# Allegro board sid_module_b2.brd
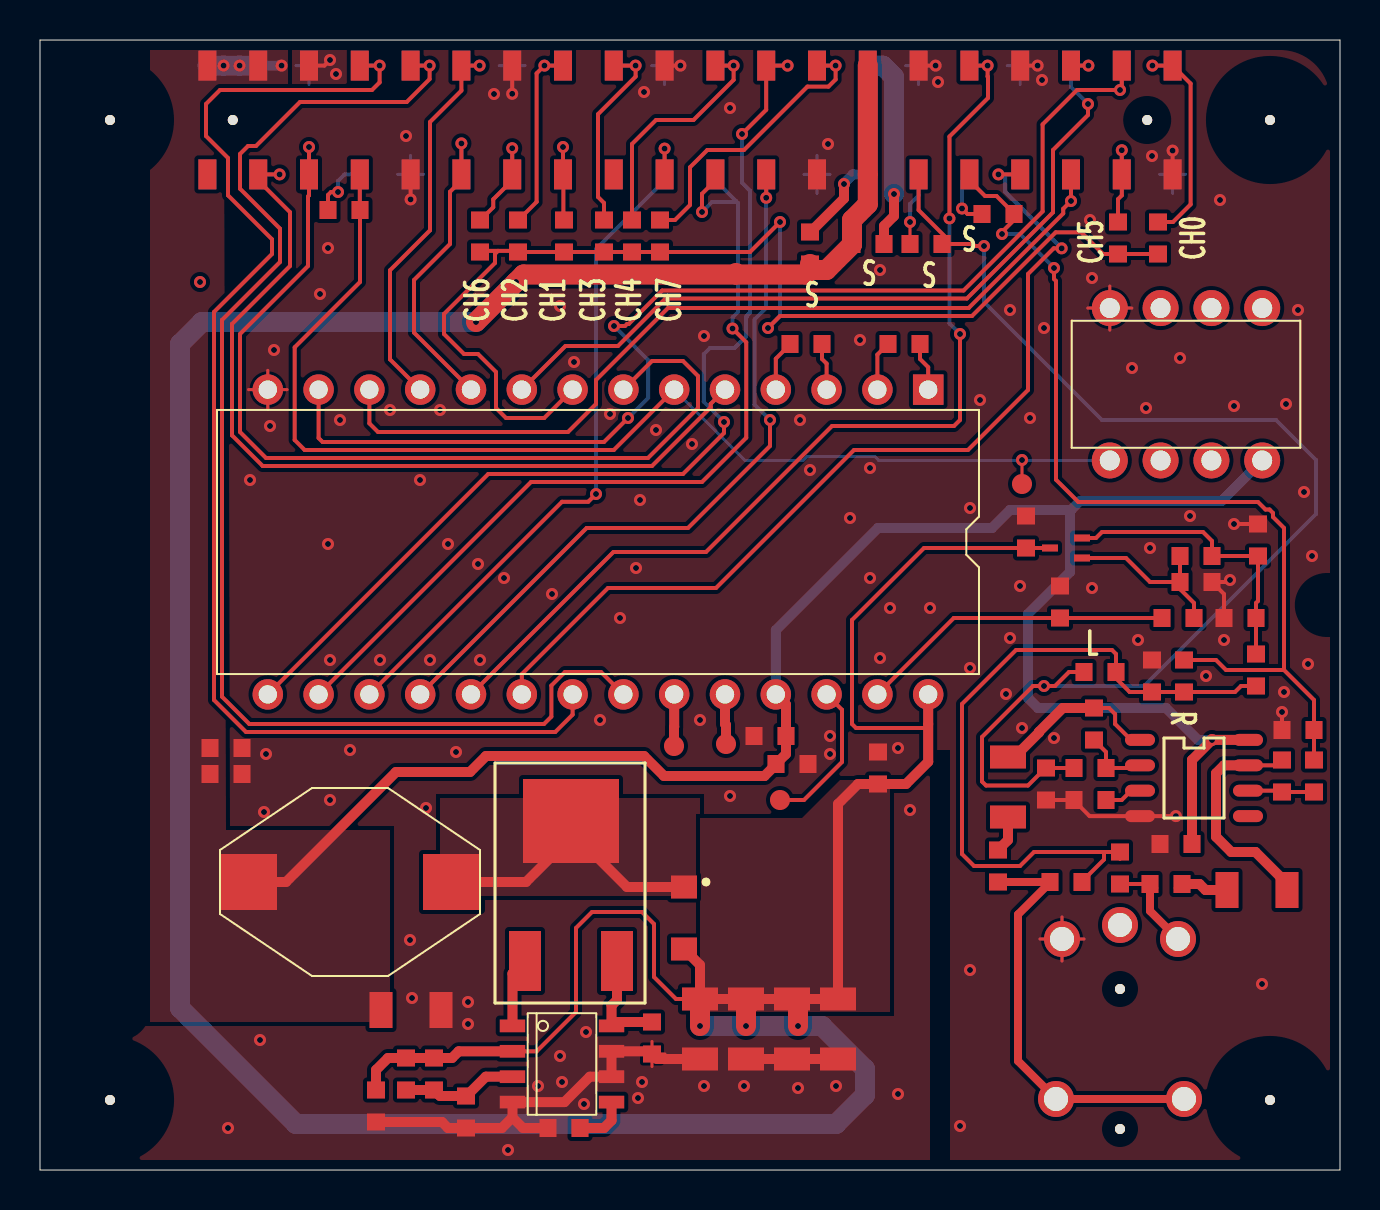
[diagram p0: board, top side]
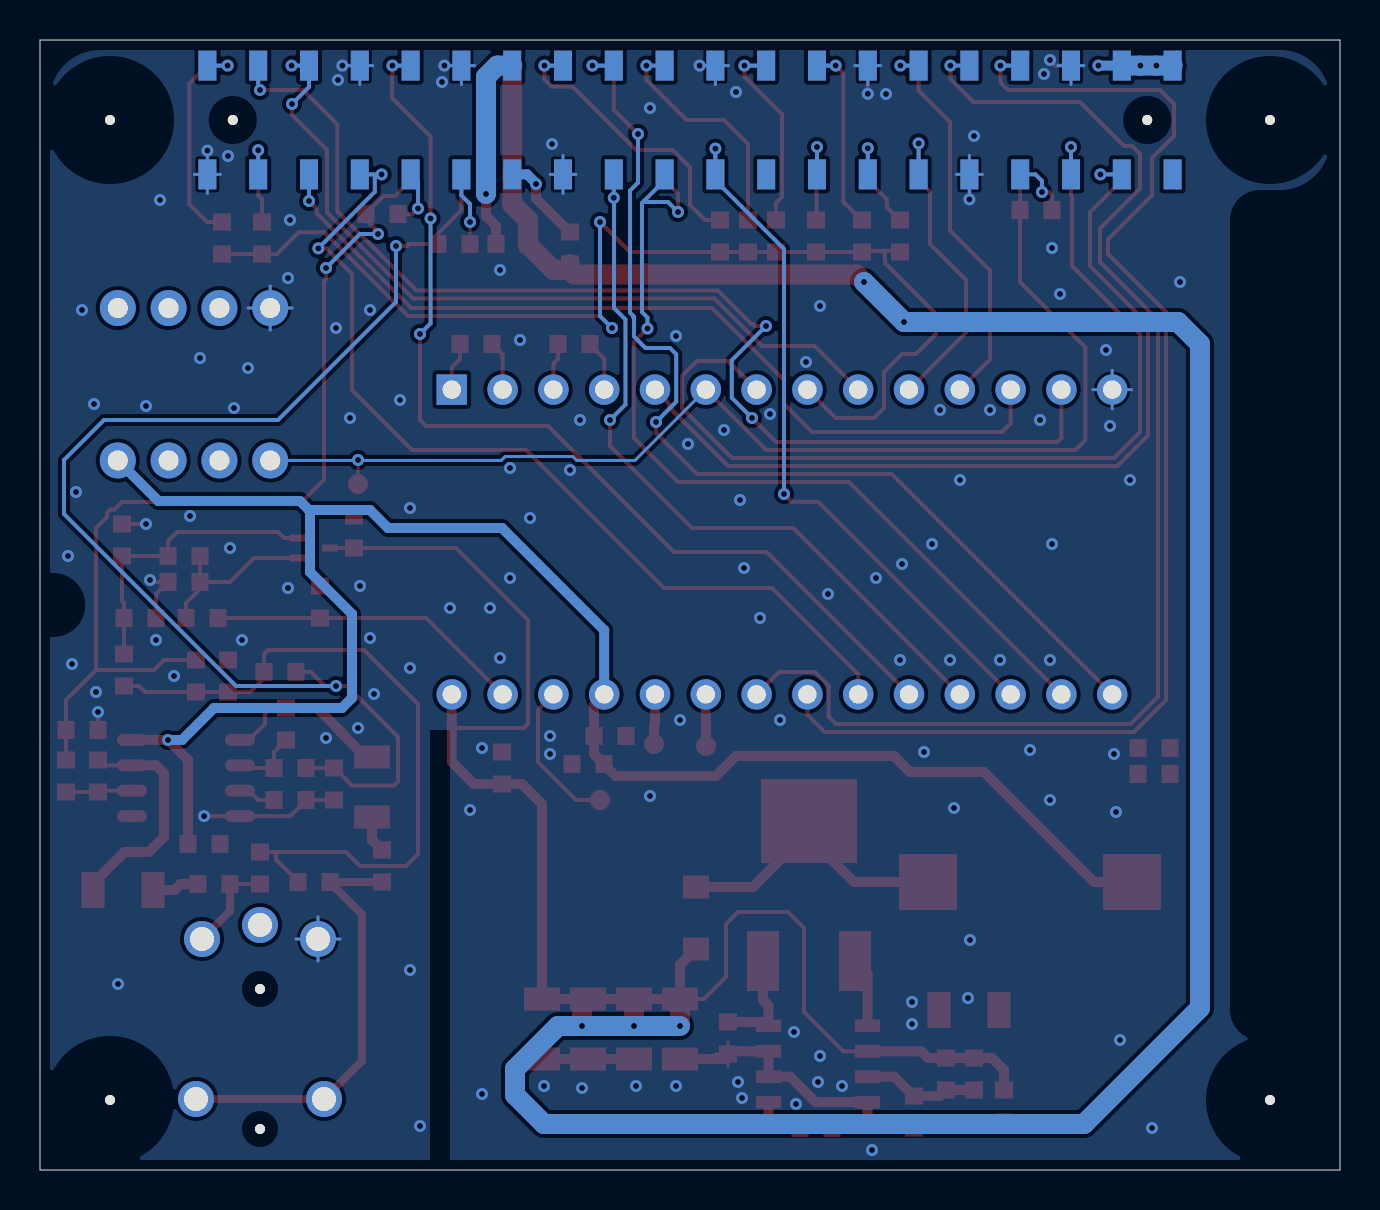
[diagram p1: board, bottom side, seen from below]

Outline 65 x 56.5 mm; copper layers: TOP, BOTTOM. Coordinates in mm from the lower left corner of the outline.
Outline path: 0,56.5 65,56.5 65,0 0,0 0,56.5

## Design rules (mm)
constraint set DEFAULT: min track width 0.15
net group RPI_INTERFACE: nets ID_SC ID_SD

## Placement (name value [footprint] x y rotation side)
C65  100n  [CAPC1608]  9.3 19.8 0 top
C67  100n  [CAPC1608]  9.3 21.1 0 top
C68  470p  [CAPC1608]  43.2 41.3 180 top
C69  470p  [CAPC1608]  38.3 41.3 180 top
C70  1n  [CAPC1608]  57.8 29.4 0 top
C71  470p  [CAPC1608]  57.8 30.7 0 top
C72  220p  [CAPC1608]  60.9 31.5 90 top
C73  10uF  [CAPC1608]  60.8 25 270 top
C74  100n  [CAPC1608]  36.5 21.7 0 top
C75  10uF  [CAPC1608]  49.3 31.9 270 top
C76  100n  [CAPC1608]  41.9 20.1 270 top
C77  10uF  [CAPC1608]  37.6 20.3 180 top
C78  100n  [CAPC1608]  56.8 16.3 0 top
C79  470uF  [CAPC3216X180N]  48.4 19.15 270 top
C80  470uF  [CAPC3216X180N]  60.85 14 180 top
C81  1n  [CAPC1608]  62.9 22 180 top
C82  1n  [CAPC1608]  50.3 19.3 270 top
C83  10uF  [CAPC1608]  52.5 18.5 0 top
C84  100n  [CAPC1608]  16.8 3.2 270 top
C85  47u  [CAPC3216X180N]  18.55 8 0 top
C86  47u  [CAPC3216X180N]  33 7.05 270 top
C87  47u  [CAPC3216X180N]  37.6 7.05 270 top
C88  47u  [CAPC3216X180N]  35.3 7.05 270 top
C89  47u  [CAPC3216X180N]  39.9 7.05 270 top
C90  100n  [CAPC1608]  26.2 2.1 180 top
C91  100pF  [CAPC1608]  18.3 4.8 90 top
D1  MBR120VLSFT3G  [SOD123FL]  32.2 12.6 270 top
J7  STX-35017-4N  [KYCON_STX-35017-4N]  54 3.55 0 top
J8  -  [95157-440LF]  32.5 52.5 0 top
J9  HLE-120-02-F-DV-BE-A  [95157-440LF_MH]  32.5 52.5 0 bottom
L3  22uH  [DO3316P]  15.5 14.4 0 top
NOREF  -  [unnamed]  3.5 52.5 0 top
NOREF#2  -  [#2]  0 53 0 top
NOREF#3  -  [#2]  6.2 71.6 0 top
NOREF#4  -  [#2]  105.34 -10.86 0 top
NOREF#5  -  [unnamed]  61.5 3.5 0 top
NOREF#6  -  [unnamed]  3.5 3.5 0 top
NOREF#7  -  [unnamed]  61.5 52.5 0 top
NOREF#8  -  [#2]  75 53 0 top
NOREF#9  -  [#2]  62 0 90 top
NOREF#10  -  [#2]  5.9 111 0 top
PP1  PP_SMT_ROUND_1P1MM  [TP_SMT_R1MM]  37 18.5 0 top
PP2  PP_SMT_ROUND_1P1MM  [TP_SMT_R1MM]  34.3 21.3 0 top
PP3  PP_SMT_ROUND_1P1MM  [TP_SMT_R1MM]  31.7 21.2 0 top
PP4  PP_SMT_ROUND_1P1MM  [TP_SMT_R1MM]  49.1 34.3 0 top
Q1  BC547B  [SOT50P160X90-3N]  51.3 31.1 180 top
Q2  MTD20N03HDL  [DPAK3]  36.05 11.75 270 top
R162  10K  [RESC1608]  56.9 27.6 180 top
R163  NF  [RESC1608]  55.6 24.7 270 top
R178  0R  [RESC1608]  15.2 48 0 top
R186  0R  [RESC1608]  26.2 46.7 90 top
R187  0R  [RESC1608]  23.9 46.7 90 top
R188  0R  [RESC1608]  28.2 46.7 90 top
R190  0R  [RESC1608]  55.9 46.6 90 top
R191  0R  [RESC1608]  29.6 46.7 90 top
R192  0R  [RESC1608]  53.9 46.6 90 top
R193  0R  [RESC1608]  22 46.7 90 top
R194  0R  [RESC1608]  31 46.7 90 top
R195  0R  [RESC1608]  41.4 46.3 0 top
R196  0R  [RESC1608]  38.5 46.1 270 top
R197  0R  [RESC1608]  44.3 46.3 0 top
R198  0R  [RESC1608]  47.9 47.8 0 top
R199  1K  [RESC1608]  60 27.6 0 top
R200  1K  [RESC1608]  51 28.4 270 top
R201  600R  [RESC1608]  53 24.9 0 top
R202  600R  [RESC1608]  57.2 24.7 270 top
R203  22K  [RESC1608]  52.7 22.3 270 top
R204  22K  [RESC1608]  62.1 19.7 270 top
R205  10K  [RESC1608]  63.7 19.7 90 top
R206  10K  [RESC1608]  52.5 20.1 180 top
R207  0R  [RESC1608]  47.9 15.2 90 top
R208  0R  [RESC1608]  56.3 14.3 0 top
R209  NF  [RESC1608]  51.3 14.4 0 top
R210  NF  [RESC1608]  54 15.1 90 top
R213  140K  [RESC1608]  19.7 4.8 270 top
R214  40mR  [RESC1608]  30.6 6.6 90 top
R215  28K  [RESC1608]  21.3 2.9 90 top
U1  MOS6581  [DIP28]  44.41 39.02 270 top
U2  TPA6111A2  [SOIC-8]  57.7 19.6 0 top
U3  MAX1771CSA  [SOIC8]  26.1 5.3 0 top
U4  -  [DIP8]  57.3 39.29 270 top

## Library data of the parts
C65 C67-C84 C90 C91 = CAP_1005_6.3V_100n
C85-C89 = CAP_2012_6.3V_10u
D1 = DIO_4
J7 = CON_AUD_STX-35017-4N
J8 = CON_40W_PINHDR
J9 = CON_2X20W_HLE_SMT
L3 = INDUCTOR
PP1-PP4 = PP_SMT_ROUND_1P1MM
Q1 = NPN_MMBT3904T
Q2 = MTD20N03HDL
R162 R163 R178 R186-R188 R190-R210 R213-R215 = RES_1005_33R
U1 = MOS6581: Tolerance: ***; User Part Number: ***
U2 = TPA6111A2
U3 = MAX1771CSA: Tolerance: ***; User Part Number: ***
U4 = DIP8

## Footprints (pads in the part's own frame, mm; a bottom-side part is the same pattern mirrored in y, then rotated)
95157-440LF
  rect 0.9x1.5 smd: 1(-24.13,-2.72) 2(-24.13,2.72) 3(-21.59,-2.72) 4(-21.59,2.72) 5(-19.05,-2.72) 6(-19.05,2.72) 7(-16.51,-2.72) 8(-16.51,2.72) 9(-13.97,-2.72) 10(-13.97,2.72) 11(-11.43,-2.72) 12(-11.43,2.72) 13(-8.89,-2.72) 14(-8.89,2.72) 15(-6.35,-2.72) 16(-6.35,2.72) 17(-3.81,-2.72) 18(-3.81,2.72) 19(-1.27,-2.72) 20(-1.27,2.72) 21(1.27,-2.72) 22(1.27,2.72) 23(3.81,-2.72) 24(3.81,2.72) 25(6.35,-2.72) 26(6.35,2.72) 27(8.89,-2.72) 28(8.89,2.72) 29(11.43,-2.72) 30(11.43,2.72) 31(13.97,-2.72) 32(13.97,2.72) 33(16.51,-2.72) 34(16.51,2.72) 35(19.05,-2.72) 36(19.05,2.72) 37(21.59,-2.72) 38(21.59,2.72) 39(24.13,-2.72) 40(24.13,2.72)
95157-440LF_MH
  round 0.5 hole 1.8 unplated: (-22.86,0) (22.86,0)
  rect 0.9x1.5 smd: 1(-24.13,-2.72) 2(-24.13,2.72) 3(-21.59,-2.72) 4(-21.59,2.72) 5(-19.05,-2.72) 6(-19.05,2.72) 7(-16.51,-2.72) 8(-16.51,2.72) 9(-13.97,-2.72) 10(-13.97,2.72) 11(-11.43,-2.72) 12(-11.43,2.72) 13(-8.89,-2.72) 14(-8.89,2.72) 15(-6.35,-2.72) 16(-6.35,2.72) 17(-3.81,-2.72) 18(-3.81,2.72) 19(-1.27,-2.72) 20(-1.27,2.72) 21(1.27,-2.72) 22(1.27,2.72) 23(3.81,-2.72) 24(3.81,2.72) 25(6.35,-2.72) 26(6.35,2.72) 27(8.89,-2.72) 28(8.89,2.72) 29(11.43,-2.72) 30(11.43,2.72) 31(13.97,-2.72) 32(13.97,2.72) 33(16.51,-2.72) 34(16.51,2.72) 35(19.05,-2.72) 36(19.05,2.72) 37(21.59,-2.72) 38(21.59,2.72) 39(24.13,-2.72) 40(24.13,2.72)
CAPC1608
  rect 0.85x0.9 smd: 1(-0.8,0) 2(0.8,0)
CAPC3216X180N
  rect 1.15x1.8 smd: 1(-1.5,0) 2(1.5,0)
DIP8
  round 1.8 hole 1: 1(-3.81,3.81) 2(-3.81,1.27) 3(-3.81,-1.27) 4(-3.81,-3.81) 5(3.81,-3.81) 6(3.81,-1.27) 7(3.81,1.27) 8(3.81,3.81)
DIP28
  rect 1.524x1.524 hole 0.914: 1(0,0)
  round 1.524 hole 0.914: 2(0,-2.54) 3(0,-5.08) 4(0,-7.62) 5(0,-10.16) 6(0,-12.7) 7(0,-15.24) 8(0,-17.78) 9(0,-20.32) 10(0,-22.86) 11(0,-25.4) 12(0,-27.94) 13(0,-30.48) 14(0,-33.02) 15(15.24,-33.02) 16(15.24,-30.48) 17(15.24,-27.94) 18(15.24,-25.4) 19(15.24,-22.86) 20(15.24,-20.32) 21(15.24,-17.78) 22(15.24,-15.24) 23(15.24,-12.7) 24(15.24,-10.16) 25(15.24,-7.62) 26(15.24,-5.08) 27(15.24,-2.54) 28(15.24,0)
DO3316P
  rect 2.9x2.8 smd: 1(-5.1,0) 2(5.1,0)
DPAK3
  rect 3x1.6 smd: 1(1.3,-11.8) 3(1.3,-7.2)
  rect 4.2x4.8 smd: 2(-5.7,-9.5)
KYCON_STX-35017-4N
  round 0.5 hole 1.2 unplated: (0,5.5) (0,-1.5)
  round 1.8 hole 1.2: 1(0,8.7) 2(-2.9,8) 3(2.9,8) 4(-3.2,0) 5(3.2,0)
RESC1608
  rect 0.85x0.9 smd: 1(-0.8,0) 2(0.8,0)
SOD123FL
  rect 1.15x1.3 smd: 1(-1.55,0) 2(1.55,0)
SOIC8
  rect 1.27x0.635 smd: 1(-2.477,1.905) 2(-2.477,0.635) 3(-2.477,-0.635) 4(-2.477,-1.905) 5(2.477,-1.905) 6(2.477,-0.635) 7(2.477,0.635) 8(2.477,1.905)
SOIC-8
  oval 1.5x0.6 smd: 1(-2.7,1.905) 2(-2.7,0.635) 3(-2.7,-0.635) 4(-2.7,-1.905) 5(2.7,-1.905) 6(2.7,-0.635) 7(2.7,0.635) 8(2.7,1.905)
SOT50P160X90-3N
  rect 0.8x0.35 smd: 1(-0.8,0.5) 2(-0.8,-0.5) 3(0.8,0)
TP_SMT_R1MM
  round 1 smd: 1(0,0)
unnamed
  round 0.5 hole 2.75 unplated: (0,0)

## Nets
5V: C65.1 C67.1 C74.2 C77.2 C78.2 C85.1 J8.2 J8.4 J9.1 J9.3 L3.1 U1.25 U2.8 U4.8
12V: C75.2 C76.2 C84.1 C86.1 C87.1 C88.1 C89.1 C91.2 D1.2 J8.27 J8.28 Q1.3 R195.1 R196.2 R213.1 U1.28(VDD) U3.2(VP)
GND: C65.2 C67.2 C70.2 C72.2 C74.1 C75.1 C76.1 C77.1 C78.1 C81.2 C82.2 C83.1 C84.2 C85.2 C86.2 C87.2 C88.2 C89.2 C90.2 J7.2 J8.6 J8.9(P9) J8.14 J8.20 J8.25 J8.30 J8.34 J8.39 J9.5 J9.10 J9.13 J9.19 J9.26 J9.29 J9.33 J9.40 R163.1 R199.1 R200.1 R214.1 R215.1 U1.14 U2.4 U3.4 U3.6 U3.7 U4.4
AUD_L: C82.1 J8.29 R197.2 R201.1 R206.2
AUD_OUT: R162.2 R200.2 U1.27
AUD_R: C81.1 J8.31 R198.2 R202.1 R205.2
GPIO2: J8.3 J9.4 U1.5
GPIO3: J8.5 J9.6 U1.7
GPIO5: J9.30 R197.1
GPIO6: J9.32 R198.1
GPIO7: J8.26 J9.25 R194.2
GPIO21: J8.40 J9.39 R190.2
GPIO22: J8.15 J9.16 R186.2
GPIO23: J8.16 J9.15 R187.2
GPIO24: J8.18 J9.17 R188.2
GPIO25: J8.22 J9.21 R191.2
GPIO26: J8.37 J9.38 R192.2
GPIO27: J8.13 J9.14 R193.2
ID_SC: J9.27 R195.2
ID_SD: J9.28 R196.1
SID_A0: J8.36 J9.35 U1.9
SID_A1: J8.11 J9.12 U1.10
SID_A2: J8.12 J9.11 U1.11
SID_A3: J8.35 J9.36 U1.12
SID_A4: J8.38 J9.37 U1.13
SID_CLK: J8.7 PP4.1 R178.2 U1.6 U4.5
SID_CS_N: R186.1 R187.1 R188.1 R190.1 R191.1 R192.1 R193.1 R194.1 U1.8
SID_D0: J8.24 J9.23 U1.15
SID_D1: J8.21 J9.22 U1.16
SID_D2: J8.19 J9.20 U1.17
SID_D3: J8.23 J9.24 U1.18
SID_D4: J8.32 J9.31 U1.19
SID_D5: J8.33 J9.34 U1.20
SID_D6: J8.8 J9.7 U1.21
SID_D7: J8.10 J9.9(P9) U1.22
N1069657: J7.4 J7.5(P5) R207.1 R209.1
N1069661: J7.3 R208.1 R210.1
N1070456: C69.2 U1.4
N1070463: C69.1 U1.3
N1070481: C68.2 U1.2
N1070488: C68.1 U1.1
N1071117: J9.8 R178.1
N1076729: C70.1 C71.1 Q1.1 R162.1
N1076755: C71.2 C72.1 C73.1 Q1.2(E) R199.2
N1077033: C73.2 R163.2 R201.2 R202.2 R209.2 R210.2
N1078035: C80.1 R204.1 U2.7(VO2)
N1078060: C79.1 R203.1 U2.1
N1078092: R203.2 R206.1 U2.2
N1078096: R204.2 R205.1 U2.6
N1078793: PP1.1 U1.26
N1078822: PP2.1 U1.24
N1078826: PP3.1 U1.23
N1081823: C80.2 R208.2
N1081858: C79.2 R207.2
N1082664: C83.2 U2.3
N2249255: D1.1 L3.2 Q2.2
N2249259: Q2.1 U3.1
N2249263: Q2.3(S) R214.2 U3.8
N2249272: C91.1 R213.2 R215.2 U3.3
N2250846: C90.1 U3.5

Pads without a net: J7 1; J8 1 17; J9 2 18; U2 5; U4 1 2 3 6 7

## Via types
v1: diameter 0.6, hole 0.3, TOP to BOTTOM, 178 vias

## Routing (per net, layer and track width the routed paths; a pad name or vN(x,y) marks a point on that pad's centre or on a via; arc(x,y) is an arc through that point)
5V: length 96.1
  TOP w0.5: C78.2 57.6,20.5 58.6,21.5 ; 58.6,21.5 60.4,21.5 ; 58.6,21.5 v1(58.6,21.5) ; U1.25 37.3,23.27 C74.2 37.3,20.8 C77.2 36.8,20.27 36.23,19.7 31.2,19.7 30.2,20.7 22.3,20.7 21.5,19.9 17.8,19.9 12.3,14.4 L3.1
  BOTTOM w0.5: 51.55,33 51.5,32.95 51.5,29.9 49.4,27.8 49.4,23.6 49.9,23.1 56.3,23.1 57.9,21.5 v1(58.6,21.5) ; 51.55,33 52,33.45 59.08,33.45 U4.8 ; 51.55,33 48.5,33 47.6,32.1 41.9,32.1 36.79,26.99 U1.25 ; v1(12.08,55.22) J8.4
  BOTTOM w1: J8.2 v1(9.18,55.22) v1(9.98,55.22) J8.4
12V: length 208.5
  TOP w0.2: 44.41,22.3 44.21,22.1 40.8,22.1 40.6,22.3 40.6,27.5 44.2,31.1 C75.2 Q1.3 ; U3.2 24.84,5.93 26.8,7.9 26.8,12.1 27.6,12.9 30.1,12.9 30.7,12.3 30.7,9.65 31.8,8.55 C86.1
  TOP w0.5: C84.1 16.8,5 17.4,5.6 C91.2 R213.1 20.6,5.6 20.93,5.93 U3.2 ; D1.2 33,10.25 C86.1 C88.1 C87.1 C89.1 39.9,18.3 40.9,19.3 C76.2 43.3,19.3 44.41,20.41 U1.28
  TOP w1: C87.1 37.9,8.25 v1(37.9,7.2) ; C88.1 35.5,8.35 35.3,8.15 v1(35.3,7.2) ; R196.2 38.5,45 ; 38.5,45 38.27,44.77 34.8,44.77 ; 38.5,45 39.33,45 40.6,46.27 R195.1 40.6,47.5 41.39,48.29 J8.27 J8.28 ; 34.8,44.77 24.18,44.77 v1(23.8,44.4) v1(21.8,42.4) ; 34.8,44.77 34.8,44.85 ; C86.1 v1(33,7.2)
  BOTTOM w1: v1(23.8,44.4) v1(21.8,42.4) 8.1,42.4 7,41.3 7,8.1 12.8,2.3 39.8,2.3 41.25,3.75 41.25,5.05 39.1,7.2 v1(37.9,7.2) v1(35.3,7.2) v1(33,7.2)
GND: length 94.1
  TOP w0.15: 30.6,5.17 R214.1 ; R214.1 31.25,5.8 ; R214.1 29.95,5.8 ; R214.1 30.6,6.43 ; 53.49,42 U4.4 ; U4.4 52.39,43.1 ; U4.4 53.49,44.2 ; U4.4 54.59,43.1 ; U1.14 11.39,39.98 ; U1.14 10.43,39.02 ; U1.14 12.35,39.02 ; U1.14 11.39,38.06 ; 50,11.55 J7.2 ; J7.2 51.1,12.65 ; J7.2 51.1,10.45 ; J7.2 52.2,11.55
  TOP w0.2: v1(14.5,55.5) 14.22,55.22 J8.6 ; v1(59.5,29.5) 59.4,29.4 C70.2 59.2,28.8 R199.1 ; v1(56.8,17.7) U2.4 52.48,17.7 51.7,18.48 C83.1 C82.2 ; J8.9 v1(18.53,48.53) ; J8.14 v1(23.61,53.81) ; C81.2 v1(62.1,22.9) ; C72.2 v1(59.7,32.3) ; J8.39 v1(56.63,50.97) ; J8.34 v1(49.88,55.22) ; J8.20 v1(32.02,55.22) ; J8.30 v1(44.78,55.22)
  TOP w0.5: C86.2 30.85,5.55 R214.1 30.46,5.93 U3.7 U3.6 27.49,4.67 26.22,3.4 23.62,3.4 23.62,2.63 ; 23.62,2.63 23.1,2.1 R215.1 20.4,2.1 20.1,2.4 C84.2 ; 23.62,2.63 24.15,2.1 C90.2 ; C89.2 C87.2 C88.2
  BOTTOM w0.15: 11.39,38.06 U1.14 ; U1.14 11.39,39.98 ; U1.14 10.43,39.02 ; U1.14 12.35,39.02 ; J8.20 31.88,55.22 ; J8.20 31.23,54.27 ; J8.20 30.58,55.22 ; 17.88,49.78 J8.9 ; J8.9 18.53,48.83 ; J8.9 18.53,50.73 ; J8.9 19.18,49.78 ; J7.2 51.1,12.65 ; J7.2 52.2,11.55 ; J7.2 51.1,10.45 ; J7.2 50,11.55 ; J8.30 44.58,55.22 ; J8.30 43.93,54.27 ; J8.30 43.28,55.22 ; 38.2,49.78 J8.25 ; J8.25 38.85,48.83 ; J8.25 38.85,50.73 ; J8.25 39.5,49.78 ; J8.6 14.1,55.22 ; J8.6 12.8,55.22 ; J8.6 13.45,54.27 ; 53.49,42 U4.4 ; U4.4 54.59,43.1 ; U4.4 53.49,44.2 ; U4.4 52.39,43.1 ; 49.01,54.27 J8.34 ; J8.34 48.36,55.22 ; J8.34 49.66,55.22 ; 56.63,48.83 J8.39 ; J8.39 55.98,49.78 ; J8.39 57.28,49.78 ; J8.39 56.63,50.73 ; 23.61,54.27 J8.14 ; J8.14 22.96,55.22 ; J8.14 24.26,55.22
  vias: v1(8,44.4) v1(9.4,2.1) v1(10.5,34.5) v1(11,6.5) v1(11.2,17.9) v1(11.3,20.8) v1(11.5,37.2) v1(11.7,41) v1(14,43.8) v1(14.4,46.1) v1(14.4,31.3) v1(14.5,25.5) v1(14.5,18.5) v1(14.8,54.8) v1(15,37.5) v1(15.5,21) v1(17,25.5) v1(17.5,38) v1(18.3,51.7) v1(18.5,11.5) v1(18.6,8.6) v1(19,34.5) v1(19.3,18.1) v1(19.5,25.5) v1(20,38) v1(20.4,31.3) v1(20.8,20.9) v1(21.4,8.4) v1(21.4,7.3) v1(21.9,30.3) v1(22,25.5) v1(22.7,53.8) v1(23.2,29.6) v1(23.4,1) v1(24.9,4.2) v1(25.6,28.8) v1(26,43.2) v1(26,5.7) v1(26.1,4.4) v1(26.7,40.4) v1(27.2,3.3) v1(27.3,6.9) v1(28,22.5) v1(28.5,37.8) v1(29,27.6) v1(29.8,30.1) v1(29.9,3.6) v1(30,33.5) v1(30.1,4.4) v1(30.2,53.9) v1(30.8,37) v1(32.6,36.3) v1(33,22.5) v1(33.2,41.7) v1(33.2,4.2) v1(34.5,53.1) v1(34.5,18.7) v1(35.2,4.2) v1(37.9,4.1) v1(38,37.5) v1(38.5,35) v1(39.4,51.3) v1(39.5,21.7) v1(39.5,20.8) v1(39.8,4.2) v1(40.5,32.6) v1(41,41.5) v1(41.5,35.1) v1(41.5,29.6) v1(42,45) v1(42,25.6) v1(42.5,28.1) v1(42.9,21.1) v1(42.9,3.8) v1(43.5,18) v1(44.5,28.1) v1(44.9,54.4) v1(46,2.2) v1(46.5,33.1) v1(46.5,25.1) v1(46.5,10) v1(47,38.5) v1(48.3,23.8) v1(48.5,43) v1(48.5,26.6) v1(49,29.2) v1(49.1,22.1) v1(49.5,37.6) v1(50.1,54.5) v1(50.2,42.1) v1(50.7,21.6) v1(52.5,47.5) v1(52.6,44.6) v1(52.6,29.1) v1(54.6,40.1) v1(54.9,26.5) v1(55.3,38.1) v1(55.5,31.1) v1(55.6,50.7) v1(57,40.6) v1(57.5,32.7) v1(58.3,24.7) v1(59,48.5) v1(59.2,26.5) v1(59.7,38.2) v1(61.1,9.3) v1(62.2,23.9) v1(62.3,38.3) v1(62.9,43) v1(63.2,33.9) v1(63.4,25.3) v1(63.6,30.7)
AUD_L: length 62.5
  TOP w0.2: J8.29 43.93,47.99 45.3,46.62 45.3,46.5 R197.2 46.55,46.3 46.65,46.2 v1(47.2,46.2) ; R201.1 51.45,24.9 50.75,24.2 v1(50.2,24.2) 49.65,24.2 47.1,21.65 47.1,19.43 47.3,19.23 49.4,19.23 50.27,20.1 C82.1 R206.2
  BOTTOM w0.2: v1(50.2,24.2) 55.2,24.2 63.8,32.8 63.8,35.5 61.8,37.5 53.1,37.5 47.2,43.4 v1(47.2,46.2)
AUD_OUT: length 15.8
  TOP w0.2: R162.2 R200.2 45.69,27.6 U1.27
AUD_R: length 48.4
  TOP w0.2: 62.2,25 59.3,25 58.8,25.5 R202.1 ; 62.2,25 62.2,32.1 61.65,32.65 61.65,32.85 61.47,33.02 61.27,33.02 60.9,33.4 51.92,33.4 50.8,34.52 50.8,44.45 50.7,44.55 v1(50.7,45.1) ; 62.2,25 63.7,23.5 C81.1 R205.2 ; v1(48.1,46.8) 48.1,46.9 48.7,47.5 R198.2 48.7,47.83 47.83,48.7 47.25,48.7 46.47,49.48 J8.31
  BOTTOM w0.2: v1(50.7,45.1) 49,46.8 v1(48.1,46.8)
GPIO2: length 44
  TOP w0.2: v1(11.98,49.78) J8.3 10.91,49.48 12.5,47.89 12.5,45.2 9.6,42.3 9.6,36.73 11.13,35.2 30.6,35.2 33.53,38.13 33.53,38.3 U1.5
  BOTTOM w0.2: J8.3 v1(11.98,49.78)
GPIO3: length 48.3
  TOP w0.2: U1.7 30.6,40.45 32.15,40.45 32.9,39.7 32.9,38.1 30.4,35.6 11.3,35.6 10,36.9 10,41.8 13.4,45.2 13.4,48.68 13.45,48.73 J8.5 ; v1(13.45,51.15) J8.5 ; J8.5 13.1,49.43
  BOTTOM w0.2: v1(13.45,51.15) J8.5
GPIO5: length 3.7
  TOP w0.15: R197.1 v1(43.5,47.4)
  BOTTOM w0.2: J9.30 43.93,48.73 43.5,48.3 v1(43.5,47.4)
GPIO6: length 3
  TOP w0.2: v1(46.1,48.08) 46.38,47.8 R198.1
  BOTTOM w0.2: J9.32 46.1,49.41 v1(46.1,48.08)
GPIO7: length 15.3
  TOP w0.2: R194.2 31.75,47.5 32.5,48.25 32.5,50.13 33.37,51 35.2,51 38.37,54.17 39.42,54.17 39.78,54.53 v1(39.78,55.22) J8.26
  BOTTOM w0.2: J8.26 v1(39.78,55.22)
GPIO21: length 11.3
  TOP w0.2: R190.2 56.65,47.4 57.53,48.28 57.53,54.32 J8.40 v1(55.62,55.22)
  BOTTOM w0.2: J8.40 v1(55.62,55.22)
GPIO22: length 5.4
  TOP w0.2: R186.2 26.17,47.53 26.17,50.16 26.15,50.18 ; J8.15 26.15,50.18 ; 26.15,50.18 v1(26.15,51.15)
  BOTTOM w0.2: J8.15 v1(26.15,51.15)
GPIO23: length 10.1
  TOP w0.2: J8.16 v1(25.22,55.22) 24.83,54.83 24.83,48.41 23.93,47.5 R187.2
  BOTTOM w0.2: J8.16 v1(25.22,55.22)
GPIO24: length 10.8
  TOP w0.2: J8.18 v1(29.78,55.22) 29.78,54.67 27.9,52.79 27.9,48.65 28.2,48.35 R188.2
  BOTTOM w0.2: v1(29.78,55.22) J8.18
GPIO25: length 12.7
  TOP w0.2: R191.2 29.6,51.3 30.8,52.5 32.67,52.5 34.68,54.51 v1(34.68,55.22) J8.22
  BOTTOM w0.2: J8.22 v1(34.68,55.22)
GPIO26: length 4.9
  TOP w0.2: v1(54.09,50.99) J8.37 54.09,48.73 53.9,48.54 R192.2 53.92,47.4
  BOTTOM w0.2: J8.37 v1(54.09,50.99)
GPIO27: length 5.6
  TOP w0.2: R193.2 22.02,47.5 22.66,48.14 22.66,48.53 23.61,49.48 J8.13 v1(23.61,51.09)
  BOTTOM w0.2: v1(23.61,51.09) J8.13
ID_SC: length 10.1
  TOP w0.5: R195.2 42.2,47.2 42.7,47.7 v1(42.7,48.8)
  BOTTOM w1: J9.27 42.14,55.22 42.7,54.66 v1(42.7,48.8)
ID_SD: length 4.5
  TOP w0.5: R196.1 38.52,46.9 40.2,48.58 v1(40.2,49.3)
  BOTTOM w0.5: J9.28 40.64,49.78 40.2,49.34 v1(40.2,49.3)
SID_A0: length 40.5
  TOP w0.2: v1(52.42,55.22) J8.36 ; U1.9 26.27,41.2 28.9,41.2 31.27,43.58 46.34,43.58 50.65,47.88 50.65,51 52.4,52.75 v1(52.4,53.3)
  BOTTOM w0.2: v1(52.4,53.3) 51.55,54.15 J8.36 ; J8.36 v1(52.42,55.22) ; J8.36 51.62,55.29
SID_A1: length 16
  TOP w0.2: v1(21.07,51.33) J8.11 21.07,49.48 20.5,48.91 20.5,46.3 18.7,44.5 18.7,41.87 U1.10
  BOTTOM w0.2: J8.11 v1(21.07,51.33)
SID_A2: length 20.1
  TOP w0.2: U1.11 17.5,40.53 17.5,44.98 19.5,46.98 19.5,52.4 21.07,53.97 J8.12 v1(21.98,55.22)
  BOTTOM w0.2: v1(21.98,55.22) J8.12
SID_A3: length 45.2
  TOP w0.2: J8.35 v1(51.55,48.45) 51.16,48.06 51.16,47.83 46.43,43.1 31.4,43.1 27.8,39.5 27.8,38.3 26.4,36.9 16.9,36.9 16.47,37.33 U1.12
  BOTTOM w0.2: J8.35 v1(51.55,48.45)
SID_A4: length 59.4
  TOP w0.2: U1.13 13.93,36.6 14.13,36.4 28.2,36.4 v1(29.4,37.6) ; J8.38 54.09,54.09 v1(54,54) 51.85,54 50.13,52.28 50.13,47.93 46.18,43.98 31.11,43.98 29.43,42.3 29.35,42.3 29.25,42.2 v1(28.7,42.2)
  BOTTOM w0.2: v1(29.4,37.6) 30.41,38.61 30.41,40.49 v1(28.7,42.2) ; J8.38 54.09,54.09 v1(54,54)
SID_CLK: length 59.9
  TOP w0.15: PP4.1 v1(49.1,35.5)
  TOP w0.2: U1.6 28.69,36 13.23,36 12.73,36.5 12.73,41.13 16,44.4 R178.2 15.99,48.01 J8.7
  BOTTOM w0.15: U1.6 35.25,35.48 38.16,35.48 38.36,35.67 41.74,35.67 41.94,35.48 49.3,35.48 ; v1(49.1,35.5) 49.28,35.5 49.3,35.48 ; 49.3,35.48 U4.5
SID_CS_N: length 58.2
  TOP w0.2: U1.8 25.21,37.6 23.3,37.6 22.8,38.1 22.8,39.9 21.9,40.8 21.2,40.8 20.2,41.8 20.2,42.8 22.75,45.35 22.75,45.81 22.9,45.96 ; v1(37,47.4) 35.5,45.9 R194.1 R191.1 R188.1 R186.1 R187.1 23.84,45.96 22.9,45.96 ; 22.9,45.96 22.06,45.96 R193.1 ; v1(36.4,42.1) 37,42.7 46.6,42.7 50.78,46.88 52.07,46.88 53.15,45.8 R192.1 R190.1
  BOTTOM w0.2: v1(36.4,42.1) 37,42.7 v1(37,47.4)
SID_D0: length 51.5
  TOP w0.2: v1(34.2,37.4) 34.2,36.85 32.15,34.8 22.41,34.8 U1.15 ; v1(35.1,51.8) 36.31,53.01 J8.24 v1(37.38,55.22)
  BOTTOM w0.2: v1(37.38,55.22) J8.24 ; v1(35.1,51.8) 35.1,49.37 35.5,48.97 35.5,42.87 35.33,42.69 35.33,42.63 35.3,42.6 35.3,41.67 34.73,41.1 33.5,41.1 33.19,40.79 33.19,38.41 v1(34.2,37.4)
SID_D1: length 44.8
  TOP w0.2: v1(33.1,47.9) 33.1,48.81 33.77,49.48 J8.21 ; v1(34.63,42.07) 35.31,41.39 35.31,36.61 33.1,34.4 24.55,34.4 U1.16
  BOTTOM w0.2: v1(33.1,47.9) 33.6,48.4 34.75,48.4 34.8,48.45 ; J8.21 33.77,49.48 34.8,48.45 ; 34.8,48.45 34.9,48.35 34.9,42.9 34.63,42.62 v1(34.63,42.07)
SID_D2: length 35.5
  TOP w0.2: U1.17 26.1,33.41 27.41,33.41 v1(27.8,33.8) ; J8.19 v1(31.23,51.07)
  BOTTOM w0.2: v1(31.23,51.07) J8.19 31.23,49.48 27.8,46.05 v1(27.8,33.8)
SID_D3: length 37.9
  TOP w0.2: v1(36.5,37.5) 36.5,36.2 32.4,32.1 27.33,32.1 U1.18 ; J8.23 v1(36.31,48.61)
  BOTTOM w0.2: v1(36.5,37.5) 35.73,38.27 35.73,42.53 36.3,43.1 36.3,48.58 36.31,48.59 v1(36.31,48.61) J8.23
SID_D4: length 50.7
  TOP w0.2: v1(46,41.8) 46,37.5 45.7,37.2 39.6,37.2 33.3,30.9 28.67,30.9 U1.19 ; J8.32 v1(47.38,55.22) 47.38,54.67 47.4,54.65 47.4,53.6 45.47,51.67 v1(45.47,47.58)
  BOTTOM w0.2: v1(47.38,55.22) J8.32 ; v1(46,41.8) 45.47,42.33 v1(45.47,47.58)
SID_D5: length 47.3
  TOP w0.2: J8.33 v1(47.92,49.78) ; v1(51.08,46.08) 50.68,46.08 49.4,44.8 49.4,39 46.4,36 40.7,36 33.8,29.1 28.4,29.1 24.09,24.79 U1.20
  BOTTOM w0.2: v1(51.08,46.08) 48.26,48.91 48.26,49.62 48.1,49.78 ; 48.1,49.78 J8.33 ; 48.1,49.78 v1(47.92,49.78)
SID_D6: length 64.3
  TOP w0.2: U1.21 26.63,22.77 25.76,21.9 10.3,21.9 8.7,23.5 8.7,42.9 11.6,45.8 11.6,46.53 9.4,48.73 9.4,50.6 8.3,51.7 8.3,53.3 9,54 16.6,54 16.98,54.38 v1(16.98,55.22) J8.8
  BOTTOM w0.2: v1(16.98,55.22) J8.8
SID_D7: length 65.9
  TOP w0.2: U1.22 28.05,24.9 26.25,24.9 25.57,24.22 25.57,22.67 25.2,22.3 10.47,22.3 9.1,23.67 9.1,42.5 12,45.4 12,47.07 10,49.07 10,50.8 10.4,51.2 10.8,51.2 13,53.4 18.33,53.4 19.48,54.55 v1(19.48,55.22) J8.10
  BOTTOM w0.2: J8.10 v1(19.48,55.22)
N1069657: length 21.3
  TOP w0.4: R207.1 R209.1 50.5,14.38 48.9,12.78 48.9,5.45 J7.4 J7.5
N1069661: length 5.2
  TOP w0.2: 55.81,14.1 55.7,14.1 R208.1 R210.1
  TOP w0.4: R208.1 55.5,12.95 J7.3
N1070456: length 2.6
  TOP w0.2: C69.2 37.5,41.27 36.79,40.56 U1.4
N1070463: length 2.4
  TOP w0.2: U1.3 39.33,40.32 39.1,40.55 C69.1
N1070481: length 2.5
  TOP w0.2: C68.2 41.87,40.77 U1.2
N1070488: length 2.4
  TOP w0.2: U1.1 44.41,40.14 44,40.55 C68.1
N1071117: length 3.1
  TOP w0.2: v1(14.9,48.9) 14.55,48.9 14.4,48.75 R178.1
  BOTTOM w0.2: J9.8 15.23,49.78 14.9,49.45 v1(14.9,48.9)
N1076729: length 8.8
  TOP w0.2: 57.03,29.4 C70.1 55.5,29.4 54.3,30.6 Q1.1 ; 57.03,29.4 57,29.43 C71.1 ; 57.03,29.4 57.03,29.02 57.7,28.35 R162.1
N1076755: length 14.8
  TOP w0.2: Q1.2 52.8,31.6 53.1,31.9 58.15,31.9 58.6,31.45 C71.2 60.88,30.7 60.89,30.71 ; C72.1 60.9,28.45 60.8,28.35 R199.2 C73.1 ; C72.1 60.9,30.7 60.89,30.71 ; C72.1 60.89,30.71 60.89,30.71
N1077033: length 36.2
  TOP w0.2: 54,15.57 R210.2 53.98,15.88 53.98,15.6 ; 54,15.57 54.02,15.6 ; 54,15.57 53.98,15.6 ; 53.98,15.6 53.67,15.9 53.2,15.9 ; R209.2 52.1,14.43 53.2,15.53 53.2,15.9 ; 53.2,15.9 49.7,15.9 49,15.2 46.7,15.2 46.1,15.8 46.1,23.3 48.8,26 53.6,26 53.8,25.8 R201.2 53.8,24.58 54.48,23.9 R163.2 R202.2 59.75,23.9 60.05,24.2 C73.2
N1078035: length 11.6
  TOP w0.2: U2.7 61.84,20.23 R204.1
  TOP w0.5: U2.7 59.2,20.23 58.8,19.84 58.8,16.66 59.56,15.9 60.77,15.9 62.35,14.32 C80.1
N1078060: length 8.6
  TOP w0.2: R203.1 53.45,23.1 53.76,22.8 53.76,22.3 54.55,21.5 55,21.5
  TOP w0.5: C79.1 48.73,20.65 49.95,21.88 49.95,21.91 51.14,23.1 R203.1
N1078092: length 3.4
  TOP w0.2: R203.2 53.3,20.9 R206.1 54.41,20.1 54.55,20.23 U2.2
N1078096: length 3.3
  TOP w0.2: U2.6 62.01,18.96 62.08,18.9 R204.2 R205.1
N1078793: length 7.6
  TOP w0.2: PP1.1 38.2,18.5 40.1,20.4 40.1,23.01 U1.26
N1078822: length 2.5
  TOP w0.5: U1.24 34.25,22.3 34.3,22.25 PP2.1
N1078826: length 2.6
  TOP w0.5: U1.23 31.71,22.16 31.7,22.15 PP3.1
N1081823: length 2.8
  TOP w0.2: 56.78,14.1 56.9,14.1 R208.2
  TOP w0.5: R208.2 57.98,14.3 58.27,14 C80.2
N1081858: length 1.9
  TOP w0.5: C79.2 48.4,16.5 R207.2
N1082664: length 1.9
  TOP w0.2: C83.2 54.09,18.5 54.55,18.96 U2.3
N2249255: length 13.6
  TOP w0.5: L3.2 24.3,14.4 26.55,16.65 26.85,16.65 29.35,14.15 D1.1
N2249259: length 3.5
  TOP w0.5: Q2.1 23.62,9.82 U3.1
N2249263: length 5.5
  TOP w0.5: R214.2 28.77,7.4 U3.8 28.58,8.23 28.85,8.5 Q2.3
N2249272: length 5.8
  TOP w0.5: U3.3 22.29,4.67 21.32,3.7 R215.2 20,3.7 R213.2 C91.1
N2250846: length 2.7
  TOP w0.5: 28.58,3.4 28.58,2.48 28.2,2.1 C90.1

## Copper pours and planes (outline as drawn; the poured copper is in the pictures)
5V on TOP: 17.5,7.4 17.5,17 9.3,17 9.2,54 12.4,54 12.4,56 5.5,56 5.5,7.4
12V on TOP: 33,17.6 33,7.9 42.5,7.9 42.5,19.5 40,19.5 38.1,17.6
GND on TOP: 0.5,53.5 1.23,55.27 3,56 58.8,56 62,56 63.77,55.27 64.5,53.5 64.5,29.85 64.34,29.85 62.74,28.25 64.34,26.65 64.5,26.65 64.5,3 63.77,1.23 62,0.5 45.5,0.5 45.5,21 44.5,21 44.5,0.5 3,0.5 1.23,1.23 0.5,3 0.5,4 1.23,5.77 3,6.5 4,6.5 5.06,6.94 5.5,8 5.5,47.5 5.06,48.56 4,49 3,49 1.23,49.73 0.5,51.5
GND on BOTTOM: 0.5,53.5 1.23,55.27 3,56 58.8,56 62,56 63.77,55.27 64.5,53.5 64.5,29.85 64.34,29.85 62.74,28.25 64.34,26.65 64.5,26.65 64.5,3 63.77,1.23 62,0.5 45.5,0.5 45.5,22 44.5,22 44.5,0.5 3,0.5 1.23,1.23 0.5,3 0.5,4 1.23,5.77 3,6.5 4,6.5 5.06,6.94 5.5,8 5.5,47.5 5.06,48.56 4,49 3,49 1.23,49.73 0.5,51.5
N2249255 on TOP: 20,18.6 20,13.7 33,13.7 33,18.6

## Text on the board
BOTTOM: LAYER4 - BOTTOM
Ref Des/Assembly Bottom: Assembly Bottom
Board Geometry/Soldermask Bottom: Solder Mask Bottom
Package Geometry/Pastemask Bottom: Paste Mask Bottom
Ref Des/Silkscreen Bottom: Silk Screen Bottom
TOP: LAYER1 - TOP
Ref Des/Assembly Top: Assembly Top
Board Geometry/Soldermask Top: Solder Mask Top
Package Geometry/Pastemask Top: Paste Mask Top
Ref Des/Silkscreen Top: Silk Screen Top | S | L | CH6 | CH2 | CH1 | CH3 | CH4 | CH7 | CH5 | CH0 | R
DEVICE_TYPE_TOP: V-Score all edges
USER_PART_NUM_TOP: Drill Drawing / Mechanical | PREPREG
User.11: FIGURE | FINISHED_SIZE | 0.3 | 0.9144 | 1.2 | 1.8 | 2.75 | DRILL CHART: TOP to BOTTOM | ALL UNITS ARE IN MILLIMETERS | PLATED | NON-PLATED | QTY | 178 | 28 | 5 | 2 | 4
